# Altium PCB PCB_proj_module_1_1.PcbDoc (part 6 of 9)
Units mm, origin at the board's own origin, x right, y up, seen from the top; angles counter-clockwise.
Board outline 413 x 280 mm, 4 copper layers (Top Layer, Signal Layer 1, Signal Layer 2, Bottom Layer), stack 0.778 mm thick; 1054 components, 639 nets, 3181 pads, 673 vias.
Unrouted connection lines stored in the file: 570.
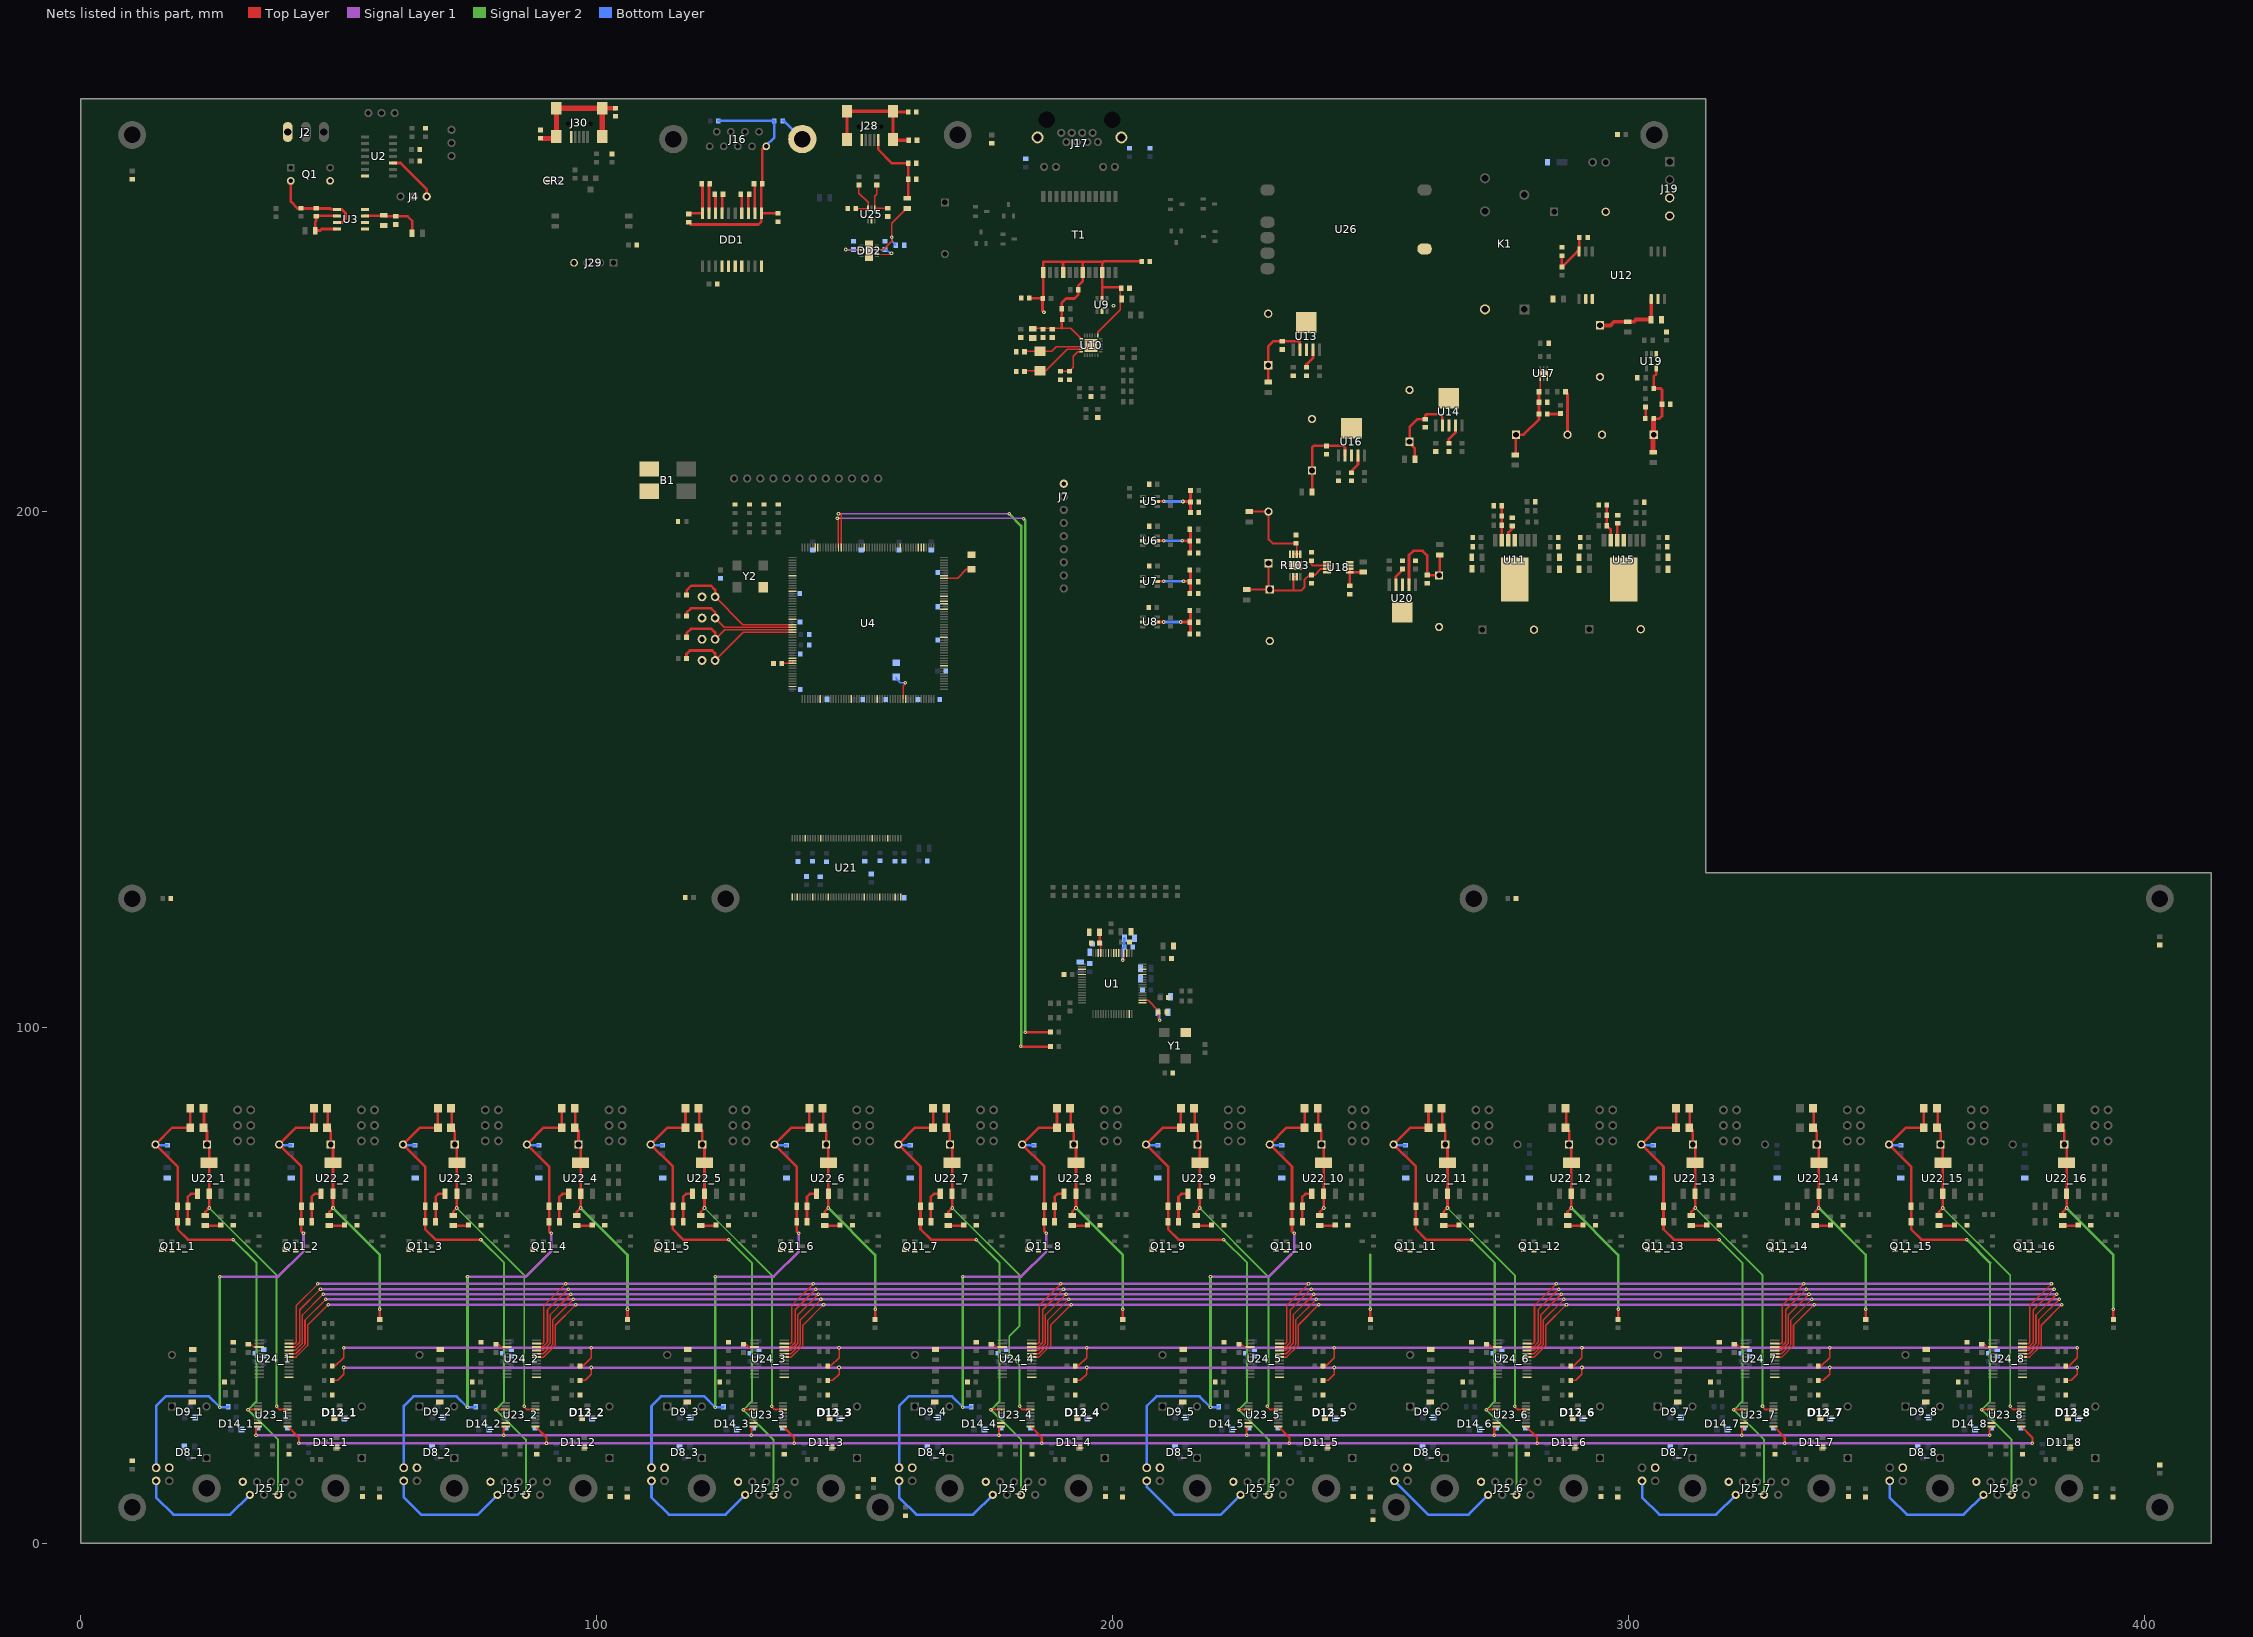
[diagram p7: the nets of this part, all layers, seen from the top]

## Via types
v1: diameter 0.7, hole 0.3, Top Layer to Bottom Layer, tented both sides, 659 vias
v2: diameter 1, hole 0.5, Top Layer to Bottom Layer, tented both sides, 12 vias
v3: diameter 0.66, hole 0.33, Top Layer to Bottom Layer, 2 vias

## Nets (pads, with @x,y where several pads share a name; then routed paths per layer and width w, separated by ;. In a path a pad name is that pad's centre, name@x,y a point inside that pad or via, vN(x,y) a via of type N, cw(c..) or ccw(c..) an arc to the next point about the centre after c; other vN are vias at no path point) (continued)
ADA4254_PGIO0: U4.141 U24_1.23 U24_2.23 U24_3.23 U24_4.23 U24_5.23 U24_6.23 U24_7.23 U24_8.23 | length 452.7
  Top Layer w0.3: U24_1.23@40.37,38.725 41.525,38.725 41.8,39 41.8,46.1 v1(46,50.3) ; U24_2.23@88.37,38.725 89.525,38.725 89.8,39 89.8,46.1 v1(94,50.3) ; U24_3.23@136.37,38.725 137.525,38.725 137.8,39 137.8,46.1 v1(142,50.3) ; U24_4.23@184.37,38.725 185.525,38.725 185.8,39 185.8,46.1 v1(190,50.3) ; U24_5.23@232.37,38.725 233.525,38.725 233.8,39 233.8,46.1 v1(238,50.3) ; U24_6.23@280.37,38.725 281.525,38.725 281.8,39 281.8,46.1 v1(286,50.3) ; U24_7.23@328.37,38.725 329.525,38.725 329.8,39 329.8,46.1 v1(334,50.3) ; U24_8.23@376.37,38.725 377.525,38.725 377.8,39 377.8,46.1 v1(382,50.3)
  Signal Layer 1 w0.5: v1(46,50.3) v1(94,50.3) v1(142,50.3) v1(190,50.3) v1(238,50.3) v1(286,50.3) v1(334,50.3) v1(382,50.3)
ADA4254_PGIO1: U4.161 U24_1.22 U24_2.22 U24_3.22 U24_4.22 U24_5.22 U24_6.22 U24_7.22 U24_8.22 | length 451.8
  Top Layer w0.3: U24_1.22@40.37,38.075 41.582,38.075 42.5,38.993 42.5,45.3 v1(46.5,49.3) ; U24_2.22@88.37,38.075 89.582,38.075 90.5,38.993 90.5,45.3 v1(94.5,49.3) ; U24_3.22@136.37,38.075 137.582,38.075 138.5,38.993 138.5,45.3 v1(142.5,49.3) ; U24_4.22@184.37,38.075 185.582,38.075 186.5,38.993 186.5,45.3 v1(190.5,49.3) ; U24_5.22@232.37,38.075 233.582,38.075 234.5,38.993 234.5,45.3 v1(238.5,49.3) ; U24_6.22@280.37,38.075 281.582,38.075 282.5,38.993 282.5,45.3 v1(286.5,49.3) ; U24_7.22@328.37,38.075 329.582,38.075 330.5,38.993 330.5,45.3 v1(334.5,49.3) ; U24_8.22@376.37,38.075 377.582,38.075 378.5,38.993 378.5,45.3 v1(382.5,49.3)
  Signal Layer 1 w0.5: v1(46.5,49.3) v1(94.5,49.3) v1(142.5,49.3) v1(190.5,49.3) v1(238.5,49.3) v1(286.5,49.3) v1(334.5,49.3) v1(382.5,49.3)
ADA4254_PGIO2: U4.162 U24_1.21 U24_2.21 U24_3.21 U24_4.21 U24_5.21 U24_6.21 U24_7.21 U24_8.21 | length 450.9
  Top Layer w0.3: U24_1.21@40.37,37.425 41.639,37.425 43,38.786 43,44.3 v1(47,48.3) ; U24_2.21@88.37,37.425 89.639,37.425 91,38.786 91,44.3 v1(95,48.3) ; U24_3.21@136.37,37.425 137.639,37.425 139,38.786 139,44.3 v1(143,48.3) ; U24_4.21@184.37,37.425 185.639,37.425 187,38.786 187,44.3 v1(191,48.3) ; U24_5.21@232.37,37.425 233.639,37.425 235,38.786 235,44.3 v1(239,48.3) ; U24_6.21@280.37,37.425 281.639,37.425 283,38.786 283,44.3 v1(287,48.3) ; U24_7.21@328.37,37.425 329.639,37.425 331,38.786 331,44.3 v1(335,48.3) ; U24_8.21@376.37,37.425 377.639,37.425 379,38.786 379,44.3 v1(383,48.3)
  Signal Layer 1 w0.5: v1(47,48.3) v1(95,48.3) v1(143,48.3) v1(191,48.3) v1(239,48.3) v1(287,48.3) v1(335,48.3) v1(383,48.3)
ADA4254_PGIO3: U4.163 U24_1.20 U24_2.20 U24_3.20 U24_4.20 U24_5.20 U24_6.20 U24_7.20 U24_8.20 | length 450
  Top Layer w0.3: U24_1.20@40.37,36.775 41.696,36.775 43.5,38.579 43.5,43.3 v1(47.5,47.3) ; U24_2.20@88.37,36.775 89.696,36.775 91.5,38.579 91.5,43.3 v1(95.5,47.3) ; U24_3.20@136.37,36.775 137.696,36.775 139.5,38.579 139.5,43.3 v1(143.5,47.3) ; U24_4.20@184.37,36.775 185.696,36.775 187.5,38.579 187.5,43.3 v1(191.5,47.3) ; U24_5.20@232.37,36.775 233.696,36.775 235.5,38.579 235.5,43.3 v1(239.5,47.3) ; U24_6.20@280.37,36.775 281.696,36.775 283.5,38.579 283.5,43.3 v1(287.5,47.3) ; U24_7.20@328.37,36.775 329.696,36.775 331.5,38.579 331.5,43.3 v1(335.5,47.3) ; U24_8.20@376.37,36.775 377.696,36.775 379.5,38.579 379.5,43.3 v1(383.5,47.3)
  Signal Layer 1 w0.5: v1(47.5,47.3) v1(95.5,47.3) v1(143.5,47.3) v1(191.5,47.3) v1(239.5,47.3) v1(287.5,47.3) v1(335.5,47.3) v1(383.5,47.3)
ADA4254_PGIO4: U4.8 U24_1.19 U24_2.19 U24_3.19 U24_4.19 U24_5.19 U24_6.19 U24_7.19 U24_8.19 | length 449.2
  Top Layer w0.3: U24_1.19@40.37,36.125 41.753,36.125 44,38.372 44,42.3 v1(48,46.3) ; U24_2.19@88.37,36.125 89.753,36.125 92,38.372 92,42.3 v1(96,46.3) ; U24_3.19@136.37,36.125 137.753,36.125 140,38.372 140,42.3 v1(144,46.3) ; U24_4.19@184.37,36.125 185.753,36.125 188,38.372 188,42.3 v1(192,46.3) ; U24_5.19@232.37,36.125 233.753,36.125 236,38.372 236,42.3 v1(240,46.3) ; U24_6.19@280.37,36.125 281.753,36.125 284,38.372 284,42.3 v1(288,46.3) ; U24_7.19@328.37,36.125 329.753,36.125 332,38.372 332,42.3 v1(336,46.3) ; U24_8.19@376.37,36.125 377.753,36.125 380,38.372 380,42.3 v1(384,46.3)
  Signal Layer 1 w0.5: v1(48,46.3) v1(96,46.3) v1(144,46.3) v1(192,46.3) v1(240,46.3) v1(288,46.3) v1(336,46.3) v1(384,46.3)
ADG1607_A0: U4.138
ADG1607_A1: U4.139
ADG1609_A0: U23_1.1 U23_2.1 U23_3.1 U23_4.1 U23_5.1 U23_6.1 U23_7.1 U23_8.1 | length 369.6
  Top Layer w0.4: U23_1.1@40.14,22.7 42.3,20.54 v1(42.3,19.4) ; U23_2.1@88.14,22.7 90.3,20.54 v1(90.3,19.4) ; U23_3.1@136.14,22.7 138.3,20.54 v1(138.3,19.4) ; U23_4.1@184.14,22.7 186.3,20.54 v1(186.3,19.4) ; U23_5.1@232.14,22.7 234.3,20.54 v1(234.3,19.4) ; U23_6.1@280.14,22.7 282.3,20.54 v1(282.3,19.4) ; U23_7.1@328.14,22.7 330.3,20.54 v1(330.3,19.4) ; U23_8.1@376.14,22.7 378.3,20.54 v1(378.3,19.4)
  Signal Layer 1 w0.5: v1(42.3,19.4) v1(90.3,19.4) v1(138.3,19.4) v1(186.3,19.4) v1(234.3,19.4) v1(282.3,19.4) v1(330.3,19.4) v1(378.3,19.4)
ADG1609_A1: U23_1.16 U23_2.16 U23_3.16 U23_4.16 U23_5.16 U23_6.16 U23_7.16 U23_8.16 | length 350.9
  Top Layer w0.4: v1(34,21) 34,22.3 U23_1.16@34.4,22.7 ; v1(82,21) 82,22.3 U23_2.16@82.4,22.7 ; v1(130,21) 130,22.3 U23_3.16@130.4,22.7 ; v1(178,21) 178,22.3 U23_4.16@178.4,22.7 ; v1(226,21) 226,22.3 U23_5.16@226.4,22.7 ; v1(274,21) 274,22.3 U23_6.16@274.4,22.7 ; v1(322,21) 322,22.3 U23_7.16@322.4,22.7 ; v1(370,21) 370,22.3 U23_8.16@370.4,22.7
  Signal Layer 1 w0.5: v1(34,21) v1(82,21) v1(130,21) v1(178,21) v1(226,21) v1(274,21) v1(322,21) v1(370,21)
AGND: C45.1
cfg0: J12.2 R41.1 U4.27 | length 25.7
  Top Layer w0.254: J12.2@122.986,183.464 128.344,178.106 U4.27@137.986,178.106
  Top Layer w0.5: R41.1@117.45,183.84 117.45,184.725 118.35,185.625 122.2,185.625 122.986,184.839 J12.2@122.986,183.464
cfg1: J13.2 R44.1 U4.28 | length 23.7
  Top Layer w0.254: J13.2@122.986,179.359 124.739,177.606 U4.28@137.986,177.606
  Top Layer w0.5: R44.1@117.45,179.736 117.45,180.425 118.275,181.25 122.225,181.25 122.986,180.489 J13.2@122.986,179.359
cfg2: J14.2 R47.1 U4.29 | length 24.1
  Top Layer w0.254: J14.2@122.986,175.255 124.837,177.106 U4.29@137.986,177.106
  Top Layer w0.5: R47.1@117.45,175.631 117.45,176.45 118.275,177.275 122.275,177.275 122.986,176.564 J14.2@122.986,175.255
cfg3: J15.2 R50.1 U4.30 | length 25.6
  Top Layer w0.254: J15.2@122.986,171.15 128.442,176.606 U4.30@137.986,176.606
  Top Layer w0.508: R50.1@117.45,171.526 117.45,172.425 118.1,173.075 122.425,173.075 122.986,172.514 J15.2@122.986,171.15
CHall+_1: J25_1.6 J27_1.1 | length 24.3
  Bottom Layer w0.508: J27_1.1@14.648,12.136 14.648,8.952 18,5.6 28.996,5.6 J25_1.6@32.812,9.416
CHall+_2: J25_2.6 J27_2.1 | length 24.3
  Bottom Layer w0.508: J27_2.1@62.648,12.136 62.648,8.952 66,5.6 76.996,5.6 J25_2.6@80.812,9.416
CHall+_3: J25_3.6 J27_3.1 | length 24.3
  Bottom Layer w0.508: J27_3.1@110.648,12.136 110.648,8.952 114,5.6 124.996,5.6 J25_3.6@128.812,9.416
CHall+_4: J25_4.6 J27_4.1 | length 24.3
  Bottom Layer w0.508: J27_4.1@158.648,12.136 158.648,8.952 162,5.6 172.996,5.6 J25_4.6@176.812,9.416
CHall+_5: J25_5.6 J27_5.1 | length 23.1
  Bottom Layer w0.508: J27_5.1@206.648,12.136 206.648,10.952 212,5.6 220.996,5.6 J25_5.6@224.812,9.416
CHall+_6: J25_6.6 J27_6.1 | length 22.5
  Bottom Layer w0.508: J27_6.1@254.648,12.136 261.184,5.6 268.996,5.6 J25_6.6@272.812,9.416
CHall+_7: J25_7.6 J27_7.1 | length 24.3
  Bottom Layer w0.508: J27_7.1@302.648,12.136 302.648,8.952 306,5.6 316.996,5.6 J25_7.6@320.812,9.416
CHall+_8: J25_8.6 J27_8.1 | length 24.3
  Bottom Layer w0.508: J27_8.1@350.648,12.136 350.648,8.952 354,5.6 364.996,5.6 J25_8.6@368.812,9.416
CPt+_1: C148_1.1 J25_1.8 R1_1.1 R2_1.1 R3_1.1 R117_1.2 TP11_1.2 U23_1.11 | length 100.4
  Top Layer w0.4: v1(32.45,25.95) U23_1.11@34.4,25.95
  Top Layer w0.5: R1_1.1@21.25,84.334 21.25,80.711 21.123,80.584 17.764,80.584 TP11_1.2@14.5,77.32 18.8,73.02 C148_1.1@18.8,65.4 R3_1.1@18.8,62.4 18.8,60.9 20.8,58.9 v1(29.6,58.9)
  Signal Layer 2 w0.4: v1(29.6,58.9) 34.1,54.4 34.1,27.539 32.511,25.95 v1(32.45,25.95) 38.292,20.108 J25_1.8@38.292,9.416
  Bottom Layer w0.5: TP11_1.2@14.5,77.32 14.65,77.17 R117_1.2@16.82,77.17
CPt+_2: C148_3.1 J25_2.8 R1_3.1 R2_3.1 R3_3.1 R117_3.2 TP11_3.2 U23_2.11 | length 100.4
  Top Layer w0.4: v1(80.45,25.95) U23_2.11@82.4,25.95
  Top Layer w0.5: R1_3.1@69.25,84.334 69.25,80.711 69.123,80.584 65.764,80.584 TP11_3.2@62.5,77.32 66.8,73.02 C148_3.1@66.8,65.4 R3_3.1@66.8,62.4 66.8,60.9 68.8,58.9 v1(77.6,58.9)
  Signal Layer 2 w0.4: v1(77.6,58.9) 82.1,54.4 82.1,27.539 80.511,25.95 v1(80.45,25.95) 86.292,20.108 J25_2.8@86.292,9.416
  Bottom Layer w0.5: TP11_3.2@62.5,77.32 62.65,77.17 R117_3.2@64.82,77.17
CPt+_3: C148_5.1 J25_3.8 R1_5.1 R2_5.1 R3_5.1 R117_5.2 TP11_5.2 U23_3.11 | length 100.4
  Top Layer w0.4: v1(128.45,25.95) U23_3.11@130.4,25.95
  Top Layer w0.5: R1_5.1@117.25,84.334 117.25,80.711 117.123,80.584 113.764,80.584 TP11_5.2@110.5,77.32 114.8,73.02 C148_5.1@114.8,65.4 R3_5.1@114.8,62.4 114.8,60.9 116.8,58.9 v1(125.6,58.9)
  Signal Layer 2 w0.4: v1(125.6,58.9) 130.1,54.4 130.1,27.539 128.511,25.95 v1(128.45,25.95) 134.292,20.108 J25_3.8@134.292,9.416
  Bottom Layer w0.5: TP11_5.2@110.5,77.32 110.65,77.17 R117_5.2@112.82,77.17
CPt+_4: C148_7.1 J25_4.8 R1_7.1 R2_7.1 R3_7.1 R117_7.2 TP11_7.2 U23_4.11 | length 100.4
  Top Layer w0.4: v1(176.45,25.95) U23_4.11@178.4,25.95
  Top Layer w0.5: R1_7.1@165.25,84.334 165.25,80.711 165.123,80.584 161.764,80.584 TP11_7.2@158.5,77.32 162.8,73.02 C148_7.1@162.8,65.4 R3_7.1@162.8,62.4 162.8,60.9 164.8,58.9 v1(173.6,58.9)
  Signal Layer 2 w0.4: v1(173.6,58.9) 178.1,54.4 178.1,27.539 176.511,25.95 v1(176.45,25.95) 182.292,20.108 J25_4.8@182.292,9.416
  Bottom Layer w0.5: TP11_7.2@158.5,77.32 158.65,77.17 R117_7.2@160.82,77.17
CPt+_5: C148_9.1 J25_5.8 R1_9.1 R2_9.1 R3_9.1 R117_9.2 TP11_9.2 U23_5.11 | length 100.4
  Top Layer w0.4: v1(224.45,25.95) U23_5.11@226.4,25.95
  Top Layer w0.5: R1_9.1@213.25,84.334 213.25,80.711 213.123,80.584 209.764,80.584 TP11_9.2@206.5,77.32 210.8,73.02 C148_9.1@210.8,65.4 R3_9.1@210.8,62.4 210.8,60.9 212.8,58.9 v1(221.6,58.9)
  Signal Layer 2 w0.4: v1(221.6,58.9) 226.1,54.4 226.1,27.539 224.511,25.95 v1(224.45,25.95) 230.292,20.108 J25_5.8@230.292,9.416
  Bottom Layer w0.5: TP11_9.2@206.5,77.32 206.65,77.17 R117_9.2@208.82,77.17
CPt+_6: C148_11.1 J25_6.8 R1_11.1 R2_11.1 R3_11.1 R117_11.2 TP11_11.2 U23_6.11 | length 100.4
  Top Layer w0.4: v1(272.45,25.95) U23_6.11@274.4,25.95
  Top Layer w0.5: R1_11.1@261.25,84.334 261.25,80.711 261.123,80.584 257.764,80.584 TP11_11.2@254.5,77.32 258.8,73.02 C148_11.1@258.8,65.4 R3_11.1@258.8,62.4 258.8,60.9 260.8,58.9 v1(269.6,58.9)
  Signal Layer 2 w0.4: v1(269.6,58.9) 274.1,54.4 274.1,27.539 272.511,25.95 v1(272.45,25.95) 278.292,20.108 J25_6.8@278.292,9.416
  Bottom Layer w0.5: TP11_11.2@254.5,77.32 254.65,77.17 R117_11.2@256.82,77.17
CPt+_7: C148_13.1 J25_7.8 R1_13.1 R2_13.1 R3_13.1 R117_13.2 TP11_13.2 U23_7.11 | length 100.4
  Top Layer w0.4: v1(320.45,25.95) U23_7.11@322.4,25.95
  Top Layer w0.5: R1_13.1@309.25,84.334 309.25,80.711 309.123,80.584 305.764,80.584 TP11_13.2@302.5,77.32 306.8,73.02 C148_13.1@306.8,65.4 R3_13.1@306.8,62.4 306.8,60.9 308.8,58.9 v1(317.6,58.9)
  Signal Layer 2 w0.4: v1(317.6,58.9) 322.1,54.4 322.1,27.539 320.511,25.95 v1(320.45,25.95) 326.292,20.108 J25_7.8@326.292,9.416
  Bottom Layer w0.5: TP11_13.2@302.5,77.32 302.65,77.17 R117_13.2@304.82,77.17
CPt+_8: C148_15.1 J25_8.8 R1_15.1 R2_15.1 R3_15.1 R117_15.2 TP11_15.2 U23_8.11 | length 100.4
  Top Layer w0.4: v1(368.45,25.95) U23_8.11@370.4,25.95
  Top Layer w0.5: R1_15.1@357.25,84.334 357.25,80.711 357.123,80.584 353.764,80.584 TP11_15.2@350.5,77.32 354.8,73.02 C148_15.1@354.8,65.4 R3_15.1@354.8,62.4 354.8,60.9 356.8,58.9 v1(365.6,58.9)
  Signal Layer 2 w0.4: 370.1,54.4 370.1,27.539 368.511,25.95 v1(368.45,25.95) 374.292,20.108 J25_8.8@374.292,9.416
  Signal Layer 2 w0.5: v1(365.6,58.9) 370.1,54.4
  Bottom Layer w0.5: TP11_15.2@350.5,77.32 350.65,77.17 R117_15.2@352.82,77.17
CurrOff: J4.3 U2.10 | length 10.1
  Top Layer w0.5: U2.10@60.505,267.554 62.017,267.554 67.09,262.481 J4.3@67.09,261.066
GND: B1.1 B1.2 C1.2 C2.1 C3.1 C4.1 C5.1 C6.2 C7.2 C8.1 C9.1 C10.1 C11.1 C12.2 C13.2 C14.1 C15.2 C16.1 C17.2 C18.1 C19.2 C20.1 C21.2 C22.1 C23.1 C24.1 C27.1 C28.1 C29.1 C30.1 C31.1 C32.1 C33.1 C34.1 C35.1 C36.1 C37.1 C38.1 C39.1 C40.1 C41.1 C42.1 C43.1 C44.1 C46.2 C47.2 C48.1 C49.1 C50.1 C51.2 C52.1 C53.1 C54.1 C55.1 C56.1 C57.1 C58.2 C59.2 C60.2 C62.1 C65.1 C66.1 C67.1 C69.1 C72.1 C73.1 C74.1 C75.1 C76.1 C77.1 C78.2 C79.1 C80.1 C81.1 C82.1 C83.1 C85.1 C86.1 C87.1 C88.1 C89.1 C90.1 C91.1 C92.1 C93.2 C94.2 C95.2 C96.1 C97.1 C98.1 C100.1 C104.2 C105.1 C106.1 C108.1 C109.1 C110.1 C111.1 C112.1 C113.1 C114.1 C115.1 C116.2 C117.2 C118.1 C119.1 C121.1 C122.1 C123.1 C124.1 C125.1 C126.1 C127.1 C129.1 C130.1 C131.2 C132.1 C133.1 C134.1 C135.1 C136.1 C137.1 C138.1 C139.1 C140.1 C141.1 C142.1 C143.1 C144.2 C145.1 C146.1 C147_1.2 C147_2.2 C147_3.2 C147_4.2 C147_5.2 C147_6.2 C147_7.2 C147_8.2 C149_1.1 C149_2.1 C149_3.1 C149_4.1 C149_5.1 C149_6.1 C149_7.1 C149_8.1 C149_9.1 C149_10.1 C149_11.1 C149_12.1 C149_13.1 C149_14.1 C149_15.1 C149_16.1 C150_1.1 C150_2.1 C150_3.1 C150_4.1 C150_5.1 C150_6.1 C150_7.1 C150_8.1 C151_1.2 C151_2.2 C151_3.2 C151_4.2 C151_5.2 C151_6.2 C151_7.2 C151_8.2 C152_1.1 C152_2.1 C152_3.1 C152_4.1 C152_5.1 C152_6.1 C152_7.1 C152_8.1 C153_1.1 C153_2.1 C153_3.1 C153_4.1 C153_5.1 C153_6.1 C153_7.1 C153_8.1 C154_1.1 C154_2.1 C154_3.1 C154_4.1 C154_5.1 C154_6.1 C154_7.1 C154_8.1 C155_1.1 C155_2.1 C155_3.1 C155_4.1 C155_5.1 C155_6.1 C155_7.1 C155_8.1 C156_1.1 C156_2.1 C156_3.1 C156_4.1 C156_5.1 C156_6.1 C156_7.1 C156_8.1 C157_1.2 C157_2.2 C157_3.2 C157_4.2 C157_5.2 C157_6.2 C157_7.2 C157_8.2 C158_1.2 C158_2.2 C158_3.2 C158_4.2 C158_5.2 C158_6.2 C158_7.2 C158_8.2 C161_1.1 C161_2.1 C161_3.1 C161_4.1 C161_5.1 C161_6.1 C161_7.1 C161_8.1 C162_1.1 C162_2.1 C162_3.1 C162_4.1 C162_5.1 C162_6.1 C162_7.1 C162_8.1 CR2.2 D1.1 D2.1 D3.1 D4.1 D5.2 D8_1.1 D8_2.1 D8_3.1 D8_4.1 D8_5.1 D8_6.1 D8_7.1 D8_8.1 D9_1.1 D9_2.1 D9_3.1 D9_4.1 D9_5.1 D9_6.1 D9_7.1 D9_8.1 D10.1 D11_1.1 D11_2.1 D11_3.1 D11_4.1 D11_5.1 D11_6.1 D11_7.1 D11_8.1 D12_1.1 D12_2.1 D12_3.1 D12_4.1 D12_5.1 D12_6.1 D12_7.1 D12_8.1 D13_1.1 D13_2.1 D13_3.1 D13_4.1 D13_5.1 D13_6.1 D13_7.1 D13_8.1 D14_1.1 D14_2.1 D14_3.1 D14_4.1 D14_5.1 D14_6.1 D14_7.1 D14_8.1 DD1.4 DD1.5 DD1.6 DD1.7 DD1.10 DD2.5 DD2.13 J2.3 J7.3 J12.1 J13.1 J14.1 J15.1 J17.SHIELD J19.3 J19.4 J25_1.1 J25_2.1 J25_3.1 J25_4.1 J25_5.1 J25_6.1 J25_7.1 J25_8.1 J26_1.1 J26_2.1 J26_3.1 J26_4.1 J26_5.1 J26_6.1 J26_7.1 J26_8.1 J28.5 J29.4 J30.5 K1.5 Q1.3 Q11_1.2 Q11_2.2 Q11_3.2 Q11_4.2 Q11_5.2 Q11_6.2 Q11_7.2 Q11_8.2 Q11_9.2 Q11_10.2 Q11_11.2 Q11_12.2 Q11_13.2 Q11_14.2 Q11_15.2 Q11_16.2 R27.2 R28.2 R36.1 R42.1 R46.1 R51.1 R54.1 R55.2 R56.1 R66.1 R68.2 R72.1 R73.1 R74.1 R78.1 R79.1 R81.1 R82.1 R83.1 R84.1 R86.1 R87.1 R88.1 R89.1 R91.1 R92.1 R96.1 R97.1 R99.1 R103.4 R103.9 R107.1 R109.2 R112.1 R115_1.1 R115_2.1 R115_3.1 R115_4.1 R115_5.1 R115_6.1 R115_7.1 R115_8.1 R115_9.1 R115_10.1 R115_11.1 R115_12.1 R115_13.1 R115_14.1 R115_15.1 R115_16.1 R116_1.1 R116_2.1 R116_3.1 R116_4.1 R116_5.1 R116_6.1 R116_7.1 R116_8.1 R116_9.1 R116_10.1 R116_11.1 R116_12.1 R116_13.1 R116_14.1 R116_15.1 R116_16.1 R120_1.1 R120_2.1 R120_3.1 R120_4.1 R120_5.1 R120_6.1 R120_7.1 R120_8.1 R127.1 R129_1.1 R129_2.1 R129_3.1 R129_4.1 R129_5.1 R129_6.1 R129_7.1 R129_8.1 TP1.2 TP2.2 TP3.2 TP4.2 TP5.2 TP6.2 TP7.2 TP9.2 TP10.2 TP16.2 TP17.2 U1.3 U1.5 U1.31 U1.33 U1.44 U1.46 U1.51 U1.54 U1.55 U1.56 U1.58 U1.62 U2.7 U3.1 U3.2 U3.4 U4.14 U4.25 U4.40 U4.51 U4.60 U4.72 U4.82 U4.93 U4.114 U4.125 U4.136 U4.149 U4.170 U4.184 U4.202 U4.203 U5.2 U6.2 U7.2 U8.2 U9.2 U10.25 U11.4 U11.8 U12.2 U12.3 U12.13 U13.3 U13.6 U14.3 U14.6 U15.4 U15.8 U16.3 U16.6 U17.3 U17.7 U18.3 U18.4 U18.5 U18.8 U19.1 U20.3 U20.6 U21.6 U21.12 U21.32 U21.38 U21.44 U21.46 U21.52 U21.58 U21.72 U21.78 U21.84 U21.86 U23_1.15 U23_2.15 U23_3.15 U23_4.15 U23_5.15 U23_6.15 U23_7.15 U23_8.15 U24_1.3 U24_1.13 U24_2.3 U24_2.13 U24_3.3 U24_3.13 U24_4.3 U24_4.13 U24_5.3 U24_5.13 U24_6.3 U24_6.13 U24_7.3 U24_7.13 U24_8.3 U24_8.13 U25.2 U26.6 Y1.2 Y2.2 | length 29.1
  Top Layer w0.2: DD2.13@153.485,251.222 DD2.5@154.335,251.222
  Top Layer w0.254: U1.46@205.842,111.29 U1.46@205.858,111.274
  Top Layer w0.3: C153_1.1@32.5,38.6 33,38.6 33.525,38.075 U24_1.3@34.63,38.075 ; C153_2.1@80.5,38.6 81,38.6 81.525,38.075 U24_2.3@82.63,38.075 ; C153_3.1@128.5,38.6 129,38.6 129.525,38.075 U24_3.3@130.63,38.075 ; DD2.13@152.835,250.572 DD2.13@153.485,251.222 ; C153_4.1@176.5,38.6 177,38.6 177.525,38.075 U24_4.3@178.63,38.075 ; C153_5.1@224.5,38.6 225,38.6 225.525,38.075 U24_5.3@226.63,38.075 ; C153_6.1@272.5,38.6 273,38.6 273.525,38.075 U24_6.3@274.63,38.075 ; C153_7.1@320.5,38.6 321,38.6 321.525,38.075 U24_7.3@322.63,38.075 ; C153_8.1@368.5,38.6 369,38.6 369.525,38.075 U24_8.3@370.63,38.075
  Top Layer w0.508: R99.1@287.799,223.236 288.2,222.835 TP7.2@288.2,214.9
  other v1: 200.2,239.9
  other v3: 195.269,232.824 196.469,232.824
GND_ISO: C25.1 C26.1 Q1.2 U3.5 U3.7 | length 18.7
  Top Layer w0.5: Q1.2@40.74,264.096 40.74,260.076 42.07,258.746 43,258.746 48.375,258.746 48.545,258.576 U3.5@49.7,258.576 50.64,258.576 51.35,257.866 51.35,256.666 50.72,256.036 U3.7@49.7,256.036
GND_RS232: C68.1 C70.1 C71.1 DD1.11 J16.5 R55.1 С1.2 | length 49.1
  Top Layer w0.508: C68.1@117.862,256.069 118.28,255.651 131.376,255.651 131.961,256.236 131.961,257.8 DD1.11@131.961,257.831 ; J16.5@132.769,270.853 132.126,270.21 C71.1@132.126,263.533 131.961,263.368 DD1.11@131.961,257.831 ; R55.1@135.2,257.8 131.992,257.8 DD1.11@131.961,257.831
  Bottom Layer w0.508: С1.2@123.617,275.73 C70.1@134.463,275.73 134.463,272.547 J16.5@132.769,270.853
MCU_AVDD: C45.2 U4.41 U4.42 | length 2.8
  Top Layer w0.254: C45.2@135.808,170.355 136.059,170.606 137.986,170.606 U4.41@137.986,171.106
MISO: R4.2 R121_1.1 R121_2.1 R121_3.1 R121_4.1 R121_5.1 R121_6.1 R121_7.1 R121_8.1 U4.193 | length 518.4
  Top Layer w0.254: R121_1.1@48.8,31.6 49.8,31.6 51,32.8 v1(51,34.1) ; R121_2.1@96.8,31.6 97.8,31.6 99,32.8 v1(99,34.1) ; R121_3.1@144.8,31.6 145.8,31.6 147,32.8 v1(147,34.1) ; v1(146.9,199.6) 146.9,199.7 147,199.8 147.4,199.4 U4.193@147.4,193.025 ; R121_4.1@192.8,31.6 193.8,31.6 195,32.8 v1(195,34.1) ; R121_5.1@240.8,31.6 241.8,31.6 243,32.8 v1(243,34.1) ; R121_6.1@288.8,31.6 289.8,31.6 291,32.8 v1(291,34.1) ; R121_7.1@336.8,31.6 337.8,31.6 339,32.8 v1(339,34.1) ; R121_8.1@384.8,31.6 385.8,31.6 387,32.8 v1(387,34.1)
  Top Layer w0.5: v1(182.2,96.4) 182.3,96.3 R4.2@188,96.3
  Signal Layer 1 w0.254: v1(146.9,199.6) v1(180,199.6)
  Signal Layer 1 w0.5: v1(51,34.1) 51.075,34.025 386.925,34.025 v1(387,34.1)
  Signal Layer 2 w0.5: v1(180,199.6) 180,199.5 182.3,197.2 182.3,96.4 v1(182.2,96.4)
MOSI: R5.2 R122_1.1 R122_2.1 R122_3.1 R122_4.1 R122_5.1 R122_6.1 R122_7.1 R122_8.1 U4.194 | length 520.5
  Top Layer w0.254: R122_1.1@48.8,34.4 49.4,34.4 51,36 v1(51,37.9) ; R122_2.1@96.8,34.4 97.4,34.4 99,36 v1(99,37.9) ; R122_3.1@144.8,34.4 145.4,34.4 147,36 v1(147,37.9) ; v1(146.7,198.7) 146.9,198.5 U4.194@146.9,193.025 ; R122_4.1@192.8,34.4 193.4,34.4 195,36 v1(195,37.9) ; R122_5.1@240.8,34.4 241.4,34.4 243,36 v1(243,37.9) ; R122_6.1@288.8,34.4 289.4,34.4 291,36 v1(291,37.9) ; R122_7.1@336.8,34.4 337.4,34.4 339,36 v1(339,37.9) ; R122_8.1@384.8,34.4 385.4,34.4 387,36 v1(387,37.9)
  Top Layer w0.5: v1(183.1,99.1) R5.2@188,99.1
  Signal Layer 1 w0.254: v1(146.7,198.7) 182.7,198.7 v1(182.8,198.6)
  Signal Layer 1 w0.5: v1(51,37.9) v1(99,37.9) v1(147,37.9) v1(195,37.9) v1(243,37.9) v1(291,37.9) v1(339,37.9) v1(387,37.9)
  Signal Layer 2 w0.5: v1(182.8,198.6) 183.1,198.3 183.1,118.8 v1(183.1,99.1)
NetC4_2: C4.2 C10.2 U1.52 | length 5.7
  Top Layer w0.3: v1(202.023,113.079) 202.228,113.285 U1.52@202.228,114.404
  Bottom Layer w0.5: v1(202.023,113.079) 202.023,115.323 C4.2@202.3,115.6 C10.2@202.3,117.3
NetC6_1: C6.1 C12.1 U1.34 | length 7.6
  Top Layer w0.254: U1.34@205.858,105.274 206.922,105.274 208.898,103.298 C6.1@208.898,102.981 208.898,101.701 v1(209.2,101.4)
  Bottom Layer w0.254: C12.1@208.868,102.936 209.2,102.604 v1(209.2,101.4) ; C12.1@209.122,103.444 C12.1@209.123,103.443
NetC14_2: C14.2 C18.2 U1.61 | length 4.2
  Top Layer w0.254: C18.2@197.5,116.4 197.728,116.172 197.728,115.858 197.695,115.824 197.695,114.437 U1.61@197.728,114.404
  Top Layer w0.5: C18.2@197.5,116.4 C14.2@197.5,118.5
NetC23_1_1: C23_1.1 R113_1.2 | length 3
  Top Layer w0.5: C23_1.1@24.2,61.6 27.06,61.6 R113_1.2@27.18,61.72
NetC23_1_2: C23_1.2 R1_1.2 R2_1.2 TP11_1.1 U22_1.2 U22_1.4 U23_1.6 | length 67.6
  Top Layer w0.35: v1(38,26.6) 38,26.5 38.55,25.95 U23_1.6@40.14,25.95
  Top Layer w0.5: R1_1.2@23.79,84.334 23.917,84.207 23.917,80.584 24.5,80.001 TP11_1.1@24.5,77.32 ; C23_1.2@24.2,63.6 24.2,64.29 v1(24.93,65.02) U22_1.2@24.93,67.77 U22_1.4@24.93,73.77 TP11_1.1@24.93,77.32
  Signal Layer 2 w0.35: v1(24.93,65.02) 38,51.95 v1(38,26.6)
NetC23_2: C23.2 C24.2 L1.1 U3.3 | length 11.9
  Top Layer w0.5: U3.3@55.1,257.306 58.735,257.306 58.803,257.238 C24.2@61.089,257.238 63.378,257.238 64.25,256.366 L1.1@64.25,253.966
NetC23_2_1: C23_2.1 R113_2.2 | length 3
  Top Layer w0.5: C23_2.1@48.2,61.6 51.06,61.6 R113_2.2@51.18,61.72
NetC23_2_2: C23_2.2 R1_2.2 R2_2.2 R131_1.1 TP11_2.1 U22_2.2 U22_2.4 | length 46.7
  Top Layer w0.5: R1_2.2@47.79,84.334 47.917,84.207 47.917,80.584 48.5,80.001 TP11_2.1@48.5,77.32 ; C23_2.2@48.2,63.6 48.2,64.29 v1(48.93,65.02) U22_2.2@48.93,67.77 U22_2.4@48.93,73.77 TP11_2.1@48.93,77.32 ; R131_1.1@58,43.4 v1(58,45.4)
  Signal Layer 2 w0.5: v1(48.93,65.02) 58,55.95 v1(58,45.4)
NetC23_3_1: C23_3.1 R113_3.2 | length 3
  Top Layer w0.5: C23_3.1@72.2,61.6 75.06,61.6 R113_3.2@75.18,61.72
NetC23_3_2: C23_3.2 R1_3.2 R2_3.2 TP11_3.1 U22_3.2 U22_3.4 U23_2.6 | length 67.7
  Top Layer w0.35: v1(86,26.6) 86,26.5 86.55,25.95 U23_2.6@88.14,25.95
  Top Layer w0.5: R1_3.2@71.79,84.334 71.917,84.207 71.917,80.584 72.5,80.001 TP11_3.1@72.5,77.32 ; C23_3.2@72.2,63.6 72.2,64.29 v1(72.93,65.02) U22_3.2@72.93,67.77 U22_3.4@72.93,73.77 TP11_3.1@72.93,77.32
  Signal Layer 2 w0.35: v1(72.93,65.02) 86,51.95 v1(86,26.6)
  Signal Layer 2 w0.5: v1(72.93,65.02) v1@73,64.95
NetC23_4_1: C23_4.1 R113_4.2 | length 3
  Top Layer w0.5: C23_4.1@96.2,61.6 99.06,61.6 R113_4.2@99.18,61.72
NetC23_4_2: C23_4.2 R1_4.2 R2_4.2 R131_2.1 TP11_4.1 U22_4.2 U22_4.4 | length 46.7
  Top Layer w0.5: R1_4.2@95.79,84.334 95.917,84.207 95.917,80.584 96.5,80.001 TP11_4.1@96.5,77.32 ; C23_4.2@96.2,63.6 96.2,64.29 v1(96.93,65.02) U22_4.2@96.93,67.77 U22_4.4@96.93,73.77 TP11_4.1@96.93,77.32 ; R131_2.1@106,43.4 v1(106,45.4)
  Signal Layer 2 w0.5: v1(96.93,65.02) 106,55.95 v1(106,45.4)
NetC23_5_1: C23_5.1 R113_5.2 | length 3
  Top Layer w0.5: C23_5.1@120.2,61.6 123.06,61.6 R113_5.2@123.18,61.72
NetC23_5_2: C23_5.2 R1_5.2 R2_5.2 TP11_5.1 U22_5.2 U22_5.4 U23_3.6 | length 67.7
  Top Layer w0.35: v1(134,26.6) 134,26.5 134.55,25.95 U23_3.6@136.14,25.95
  Top Layer w0.5: R1_5.2@119.79,84.334 119.917,84.207 119.917,80.584 120.5,80.001 TP11_5.1@120.5,77.32 ; C23_5.2@120.2,63.6 120.2,64.29 v1(120.93,65.02) U22_5.2@120.93,67.77 U22_5.4@120.93,73.77 TP11_5.1@120.93,77.32
  Signal Layer 2 w0.35: v1(120.93,65.02) 134,51.95 v1(134,26.6)
  Signal Layer 2 w0.5: v1(120.93,65.02) v1@121,64.95
NetC23_6_1: C23_6.1 R113_6.2 | length 3
  Top Layer w0.5: C23_6.1@144.2,61.6 147.06,61.6 R113_6.2@147.18,61.72
NetC23_6_2: C23_6.2 R1_6.2 R2_6.2 R131_3.1 TP11_6.1 U22_6.2 U22_6.4 | length 46.7
  Top Layer w0.5: R1_6.2@143.79,84.334 143.917,84.207 143.917,80.584 144.5,80.001 TP11_6.1@144.5,77.32 ; C23_6.2@144.2,63.6 144.2,64.29 v1(144.93,65.02) U22_6.2@144.93,67.77 U22_6.4@144.93,73.77 TP11_6.1@144.93,77.32 ; R131_3.1@154,43.4 v1(154,45.4)
  Signal Layer 2 w0.5: v1(144.93,65.02) 154,55.95 v1(154,45.4)
NetC23_7_1: C23_7.1 R113_7.2 | length 3
  Top Layer w0.5: C23_7.1@168.2,61.6 171.06,61.6 R113_7.2@171.18,61.72
NetC23_7_2: C23_7.2 R1_7.2 R2_7.2 TP11_7.1 U22_7.2 U22_7.4 U23_4.6 | length 69.4
  Top Layer w0.35: v1(182,26.6) 182,26.5 182.55,25.95 U23_4.6@184.14,25.95
  Top Layer w0.5: R1_7.2@167.79,84.334 167.917,84.207 167.917,80.584 168.5,80.001 TP11_7.1@168.5,77.32 ; C23_7.2@168.2,63.6 168.2,64.29 v1(168.93,65.02) U22_7.2@168.93,67.77 U22_7.4@168.93,73.77 TP11_7.1@168.93,77.32
  Signal Layer 2 w0.35: v1(168.93,65.02) 182,51.95 182,42.2 180,40.2 180,36.5 182,34.5 v1(182,26.6)
  Signal Layer 2 w0.5: v1(168.93,65.02) v1@169,64.95
NetC23_8_1: C23_8.1 R113_8.2 | length 3
  Top Layer w0.5: C23_8.1@192.2,61.6 195.06,61.6 R113_8.2@195.18,61.72
NetC23_8_2: C23_8.2 R1_8.2 R2_8.2 R131_4.1 TP11_8.1 U22_8.2 U22_8.4 | length 46.8
  Top Layer w0.5: R1_8.2@191.79,84.334 191.917,84.207 191.917,80.584 192.5,80.001 TP11_8.1@192.5,77.32 ; C23_8.2@192.2,63.6 192.2,64.29 v1(192.93,65.02) U22_8.2@192.93,67.77 U22_8.4@192.93,73.77 TP11_8.1@192.93,77.32 ; R131_4.1@202,43.4 v1(202,45.4)
  Signal Layer 2 w0.5: v1@193,64.95 v1(192.93,65.02) 202,55.95 v1(202,45.4)
NetC23_9_1: C23_9.1 R113_9.2 | length 3
  Top Layer w0.5: C23_9.1@216.2,61.6 219.06,61.6 R113_9.2@219.18,61.72
NetC23_9_2: C23_9.2 R1_9.2 R2_9.2 TP11_9.1 U22_9.2 U22_9.4 U23_5.6 | length 67.9
  Top Layer w0.35: v1(230,26.6) 230,26.5 230.55,25.95 U23_5.6@232.14,25.95
  Top Layer w0.5: R1_9.2@215.79,84.334 215.917,84.207 215.917,80.584 216.5,80.001 TP11_9.1@216.5,77.32 ; C23_9.2@216.2,63.6 216.2,64.29 v1(216.93,65.02) U22_9.2@216.93,67.77 U22_9.4@216.93,73.77 TP11_9.1@216.93,77.32
  Signal Layer 2 w0.35: v1(216.93,65.02) 230.225,51.725 230.225,26.825 v1(230,26.6)
  Signal Layer 2 w0.5: v1(216.93,65.02) v1@217,64.95
NetC23_10_1: C23_10.1 R113_10.2 | length 3
  Top Layer w0.5: C23_10.1@240.2,61.6 243.06,61.6 R113_10.2@243.18,61.72
NetC23_10_2: C23_10.2 R1_10.2 R2_10.2 R131_5.1 TP11_10.1 U22_10.2 U22_10.4 | length 34
  Top Layer w0.5: R1_10.2@239.79,84.334 239.917,84.207 239.917,80.584 240.5,80.001 TP11_10.1@240.5,77.32 ; C23_10.2@240.2,63.6 240.2,64.29 v1(240.93,65.02) U22_10.2@240.93,67.77 U22_10.4@240.93,73.77 TP11_10.1@240.93,77.32 ; R131_5.1@250,43.4 v1(250,45.4)
  Signal Layer 2 w0.5: v1(240.93,65.02) v1@241,64.95 ; v1(250,45.4) 250,55.95
NetC23_11_1: C23_11.1 R113_11.2 | length 3
  Top Layer w0.5: C23_11.1@264.2,61.6 267.06,61.6 R113_11.2@267.18,61.72
NetC23_11_2: C23_11.2 R1_11.2 R2_11.2 TP11_11.1 U22_11.2 U22_11.4 U23_6.6 | length 67.7
  Top Layer w0.35: v1(278,26.6) 278,26.5 278.55,25.95 U23_6.6@280.14,25.95
  Top Layer w0.5: R1_11.2@263.79,84.334 263.917,84.207 263.917,80.584 264.5,80.001 TP11_11.1@264.5,77.32 ; C23_11.2@264.2,63.6 264.2,64.29 v1(264.93,65.02) U22_11.2@264.93,67.77 U22_11.4@264.93,73.77 TP11_11.1@264.93,77.32
  Signal Layer 2 w0.35: v1(264.93,65.02) 278,51.95 v1(278,26.6)
  Signal Layer 2 w0.5: v1(264.93,65.02) v1@265,64.95
NetC23_12_1: C23_12.1 R113_12.2 | length 3
  Top Layer w0.5: C23_12.1@288.2,61.6 291.06,61.6 R113_12.2@291.18,61.72
NetC23_12_2: C23_12.2 R1_12.2 R2_12.2 R131_6.1 TP11_12.1 U22_12.2 U22_12.4 | length 46.8
  Top Layer w0.5: R1_12.2@287.79,84.334 287.917,84.207 287.917,80.584 288.5,80.001 TP11_12.1@288.5,77.32 ; C23_12.2@288.2,63.6 288.2,64.29 v1(288.93,65.02) U22_12.2@288.93,67.77 U22_12.4@288.93,73.77 TP11_12.1@288.93,77.32 ; R131_6.1@298,43.4 v1(298,45.4)
  Signal Layer 2 w0.5: v1@289,64.95 v1(288.93,65.02) 298,55.95 v1(298,45.4)
NetC23_13_1: C23_13.1 R113_13.2 | length 3
  Top Layer w0.5: C23_13.1@312.2,61.6 315.06,61.6 R113_13.2@315.18,61.72
NetC23_13_2: C23_13.2 R1_13.2 R2_13.2 TP11_13.1 U22_13.2 U22_13.4 U23_7.6 | length 67.7
  Top Layer w0.35: v1(326,26.6) 326,26.5 326.55,25.95 U23_7.6@328.14,25.95
  Top Layer w0.5: R1_13.2@311.79,84.334 311.917,84.207 311.917,80.584 312.5,80.001 TP11_13.1@312.5,77.32 ; C23_13.2@312.2,63.6 312.2,64.29 v1(312.93,65.02) U22_13.2@312.93,67.77 U22_13.4@312.93,73.77 TP11_13.1@312.93,77.32
  Signal Layer 2 w0.35: v1(312.93,65.02) 326,51.95 v1(326,26.6)
  Signal Layer 2 w0.5: v1(312.93,65.02) v1@313,64.95
NetC23_14_1: C23_14.1 R113_14.2 | length 3
  Top Layer w0.5: C23_14.1@336.2,61.6 339.06,61.6 R113_14.2@339.18,61.72
NetC23_14_2: C23_14.2 R1_14.2 R2_14.2 R131_7.1 TP11_14.1 U22_14.2 U22_14.4 | length 46.8
  Top Layer w0.5: R1_14.2@335.79,84.334 335.917,84.207 335.917,80.584 336.5,80.001 TP11_14.1@336.5,77.32 ; C23_14.2@336.2,63.6 336.2,64.29 v1(336.93,65.02) U22_14.2@336.93,67.77 U22_14.4@336.93,73.77 TP11_14.1@336.93,77.32 ; R131_7.1@346,43.4 v1(346,45.4)
  Signal Layer 2 w0.5: v1@337,64.95 v1(336.93,65.02) 346,55.95 v1(346,45.4)
NetC23_15_1: C23_15.1 R113_15.2 | length 3
  Top Layer w0.5: C23_15.1@360.2,61.6 363.06,61.6 R113_15.2@363.18,61.72
NetC23_15_2: C23_15.2 R1_15.2 R2_15.2 TP11_15.1 U22_15.2 U22_15.4 U23_8.6 | length 67.7
  Top Layer w0.35: v1(374,26.6) 374,26.5 374.55,25.95 U23_8.6@376.14,25.95
  Top Layer w0.5: R1_15.2@359.79,84.334 359.917,84.207 359.917,80.584 360.5,80.001 TP11_15.1@360.5,77.32 ; C23_15.2@360.2,63.6 360.2,64.29 v1(360.93,65.02) U22_15.2@360.93,67.77 U22_15.4@360.93,73.77 TP11_15.1@360.93,77.32
  Signal Layer 2 w0.35: v1(360.93,65.02) 374,51.95 v1(374,26.6)
  Signal Layer 2 w0.5: v1(360.93,65.02) v1@361,64.95
NetC23_16_1: C23_16.1 R113_16.2 | length 3
  Top Layer w0.5: C23_16.1@384.2,61.6 387.06,61.6 R113_16.2@387.18,61.72
NetC23_16_2: C23_16.2 R1_16.2 R2_16.2 R131_8.1 TP11_16.1 U22_16.2 U22_16.4 | length 46.7
  Top Layer w0.5: R1_16.2@383.79,84.334 383.917,84.207 383.917,80.584 384.5,80.001 TP11_16.1@384.5,77.32 ; C23_16.2@384.2,63.6 384.2,64.29 v1(384.93,65.02) U22_16.2@384.93,67.77 U22_16.4@384.93,73.77 TP11_16.1@384.93,77.32 ; R131_8.1@394,43.4 v1(394,45.4)
  Signal Layer 2 w0.5: v1(384.93,65.02) 394,55.95 v1(394,45.4)
NetC25_2: C25.2 L2.2 U3.6 U3.8 | length 11.2
  Top Layer w0.5: U3.8@49.7,254.766 46.725,254.766 46.43,254.471 L2.2@45.475,254.471 45.475,256.196 45.675,256.396 45.675,257.146 45.835,257.306 U3.6@49.7,257.306
NetC46_1: C46.1 U4.92 | length 5.7
  Top Layer w0.254: U4.92@159.411,163.681 159.411,166.201 159.8,166.59 v1(159.8,166.8)
  Bottom Layer w0.254: C46.1@158.086,167.935 158.086,167.554 158.84,166.8 v1(159.8,166.8)
NetC47_1: C47.1 U4.148 | length 6
  Top Layer w0.254: U4.148@167.325,187.1 170,187.1 171.703,188.803 C47.1@172.65,188.803
NetC50_2: C50.2 R33.1 R36.2 U5.5 | length 10
  Top Layer w0.508: U5.5@208.7,201.97 v1@209.71,201.97 ; v1(213.661,201.963) 214.875,201.963 R36.2@214.882,201.97 ; C50.2@215.136,199.684 R36.2@215.136,201.716 ; R36.2@215.136,201.97 R33.1@215.136,204.002
  Bottom Layer w0.508: v1(209.964,201.97) 209.971,201.963 v1(213.661,201.963)
NetC53_2: C53.2 R40.1 R42.2 U6.5 | length 11
  Top Layer w0.508: U6.5@208.7,194.35 v1(209.964,194.35) ; v1(213.536,194.363) 215.036,194.363 R42.2@215.136,194.263 ; C53.2@215.136,192.318 R42.2@215.136,194.263 ; R40.1@215.136,196.382 215.136,194.35 R42.2@215.136,194.263
  Bottom Layer w0.508: v1(209.964,194.35) v1@213.849,194.35 ; v1(213.536,194.363) v1@213.662,194.363
NetC55_2: C55.2 R45.1 R46.2 U7.5 | length 10.5
  Top Layer w0.508: U7.5@208.7,186.476 v1(209.964,186.476) ; v1(213.774,186.476) R46.2@215.136,186.476 ; C55.2@215.136,184.444 R46.2@215.136,186.476 ; R45.1@215.136,188.508 R46.2@215.136,186.476
  Bottom Layer w0.508: v1(209.964,186.476) v1(213.774,186.476)
NetC57_2: C57.2 R49.1 R51.2 U8.5 | length 10.5
  Top Layer w0.508: U8.5@208.7,178.602 v1(209.964,178.602) ; v1(213.266,178.602) R51.2@215.136,178.602 ; C57.2@215.136,176.57 R51.2@215.136,178.602 ; R49.1@215.136,180.634 R51.2@215.136,178.602
  Bottom Layer w0.508: v1(209.964,178.602) v1(213.266,178.602)
NetC58_1: C58.1 C59.1 J28.1 L3.2 | length 15.6
  Top Layer w0.5: J28.1@154.575,272 154.575,270.225 157.3,267.5 C59.1@160.4,267.5 C58.1@160.4,264.4 160.4,260.895 L3.2@160.225,260.72
NetC60_1: C60.1 DD2.4 L3.1 | length 13.1
  Top Layer w0.2: DD2.4@154.335,250.772 155.595,250.772
  Top Layer w0.254: 155.595,250.772 157.185,252.362 v1(157.185,253.144) 157.185,255.901 160.005,258.72 L3.1@160.225,258.72
  Bottom Layer w0.254: v1(157.185,253.144) 157.185,252.456 C60.1@158.021,251.62
NetC61_1: C61.1 DD1.17 | length 3.4
  Top Layer w0.508: DD1.17@124.341,258.2 124.341,261.336 C61.1@124.506,261.501
NetC61_2: C61.2 DD1.18 | length 3.4
  Top Layer w0.508: C61.2@122.906,261.501 123.071,261.336 DD1.18@123.071,258.2
NetC62_2: C62.2 C65.2 DD2.2 DD2.3 DD2.9 | length 15.3
  Top Layer w0.2: v1@148.345,250.772 DD2.9@151.335,250.772 ; DD2.3@154.335,250.322 DD2.2@154.335,249.872 v1@156.981,249.872
  Top Layer w0.254: v1(148.325,250.792) v1@148.345,250.772 ; v1@156.981,249.872 v1(157.177,250.068)
  Bottom Layer w0.254: v1(148.325,250.792) C62.2@149.811,250.792 C65.2@155.907,250.792 156.199,250.792 v1@156.923,250.068
NetC63_1: C63.1 DD1.13 | length 3.4
  Top Layer w0.508: DD1.13@129.421,258.2 129.421,261.336 C63.1@129.586,261.501
NetC63_2: C63.2 DD1.14 | length 3.4
  Top Layer w0.508: C63.2@127.986,261.501 128.151,261.336 DD1.14@128.151,258.2
NetC64_1: C64.1 C68.2 DD1.20 | length 8.1
  Top Layer w0.508: C68.2@117.862,257.669 118.024,257.831 DD1.20@120.531,257.831 ; C64.1@120.366,263.533 120.531,263.368 DD1.20@120.531,258.2
NetC64_2: C64.2 DD1.19 | length 5.4
  Top Layer w0.508: DD1.19@121.801,258.2 121.801,263.368 C64.2@121.966,263.533
NetC67_2: C67.2 R53.1 U25.4 | length 7.2
  Top Layer w0.3: R53.1@154.3,263.3 154.3,261.509 153.923,261.132 U25.4@153.923,258.805 156.445,258.805 C67.2@156.45,258.8
NetC69_2: C69.2 R52.1 U25.6 | length 7.6
  Top Layer w0.254: C69.2@150.261,258.732 152.55,258.732 U25.6@152.623,258.805 152.623,259.927 150.867,261.683 R52.1@150.867,263.308
NetC70_2: C70.2 J16.11 | length 7
  Top Layer w0.508: J16.11@139.784,272.276 J16.11@141.105,270.955
  Bottom Layer w0.508: C70.2@136.063,275.73 136.33,275.73 J16.11@139.784,272.276
NetC71_2: C71.2 DD1.12 | length 5.4
  Top Layer w0.508: C71.2@130.526,263.533 130.691,263.368 DD1.12@130.691,258.2
NetC72_2: C72.2 J28.6 R56.2 | length 25.5
  Top Layer w0.6: J28.6@148.55,272.1 J28.6@148.55,277.6 J28.6@157.45,277.6 J28.6@157.45,272.1 ; J28.6@157.654,271.973 C72.2@160.504,271.973 ; J28.6@157.654,277.473 R56.2@160.404,277.473
NetC73_2: C73.2 C78.1 C79.2 C80.2 C81.2 C82.2 L4.2 R60.2 R61.2 R62.2 R63.2 T1.1 T1.4 T1.7 T1.10 U9.5 U10.1 U10.19 | length 82.4
  Top Layer w0.254: C78.1@184.511,235.668 184.665,235.514 C79.2@188.321,235.514 ; C82.2@186.721,235.514 190.3,235.514 191.929,235.514 U10.1@193.969,233.474 ; U10.19@197.119,234.124 197.119,234.791 201.478,239.15 C73.2@201.478,243.511
  Top Layer w0.508: C81.2@184,241.375 184.007,241.368 R63.2@186.433,241.368 ; v1(186.721,238.6) 186.433,238.888 R63.2@186.433,241.368 ; 190.3,235.514 190.2,235.614 190.2,237.2 R60.2@190.2,239.3 190.2,240.5 191,241.3 192.6,241.3 193.4,242.1 193.4,242.9 193.4,243.8 194.218,244.618 194.218,248.413 ; T1.4@190.408,246.414 190.408,248.159 ; U9.5@197.96,241.273 198.028,241.341 198.028,248.159 ; 198.053,243.511 C73.2@201.478,243.511 ; C80.2@205.6,248.5 198.369,248.5 198.028,248.159 ; R63.2@186.433,241.368 186.598,241.533 186.598,248.375 186.636,248.413 194.218,248.413 ; 194.218,248.413 197.774,248.413 198.028,248.159
NetC74_2: C74.2 U10.4 X2.2 | length 11.4
  Top Layer w0.254: C74.2@182.949,230.98 183.071,231.102 X2.2@185.959,231.102 188.202,231.102 189.074,231.974 U10.4@193.969,231.974
NetC75_2: C75.2 C77.2 U10.6 | length 6.9
  Top Layer w0.254: C77.2@189.903,227.18 C75.2@191.681,227.18 192.443,227.942 192.443,230.098 193.319,230.974 U10.6@193.969,230.974
NetC83_2: C83.2 U10.5 X2.1 | length 12.8
  Top Layer w0.254: C83.2@182.949,227.17 183.081,227.302 X2.1@185.959,227.302 187.079,227.302 191.251,231.474 U10.5@193.969,231.474
NetC84_2: C84.2 R77.2 R79.2 U11.6 | length 6.7
  Top Layer w0.508: U11.6@275.464,194.454 275.464,197.34 C84.2@275.468,197.344 R77.2@275.468,199.122 R79.2@275.468,201.12
NetC93_1: C93.1 U11.5 | length 3.1
  Top Layer w0.508: U11.5@276.734,194.454 276.734,195.972 277.496,196.734 C93.1@277.496,197.204
NetC94_1: C94.1 L24.1 TP4.1 U12.12 | length 14.7
  Top Layer w0.75: TP4.1@294.2,236.1 TP4.1@294.5,236.1 296.5,236.1 297.2,236.8 L24.1@299.9,236.8 301.1,236.8 301.5,237.2 C94.1@304.4,237.2 ; C94.1@304.43,237.2 U12.12@304.43,241.2
NetC97_2: C97.2 R80.1 R81.2 U12.28 | length 9.5
  Top Layer w0.5: R81.2@287.1,249.6 R80.1@287.1,247.4 290.11,250.41 U12.28@290.46,250.41 290.46,253.06 C97.2@290.5,253.1
NetC98_2: C98.2 L7.1 TP2.1 U13.2 | length 15
  Top Layer w0.508: L7.1@230.227,225.1 230.227,232.068 231.202,233.043 236.11,233.043 236.323,232.83 U13.2@236.323,231.354
NetC100_2: C100.2 U13.4 | length 3.9
  Top Layer w0.508: C100.2@237.593,227.948 237.593,228.512 238.863,229.782 U13.4@238.863,231.354
NetC105_2: C105.2 L9.1 TP3.1 U14.2 | length 16.5
  Top Layer w0.508: L9.1@258.587,210.1 258.587,212.304 257.587,213.304 TP3.1@257.587,213.558 257.587,216.387 259.114,217.914 C105.2@260.635,217.914 260.635,218.638 260.889,218.892 263.429,218.892 263.937,218.384 U14.2@263.937,216.654
NetC106_2: C106.2 U14.4 | length 3.9
  Top Layer w0.508: C106.2@265.207,213.248 265.207,214.066 266.477,215.336 U14.4@266.477,216.654
NetC107_2: C107.2 R95.2 R97.2 U15.6 | length 7.2
  Top Layer w0.508: R97.2@295.818,201.306 R95.2@295.818,199.274 C107.2@295.818,197.242 296.542,196.518 U15.6@296.542,194.454
NetC117_1: C117.1 U15.5 | length 3.3
  Top Layer w0.508: U15.5@297.812,194.454 297.812,197.574 C117.1@297.95,197.712
NetC118_2: C118.2 L10.1 TP5.1 U16.2 | length 16.8
  Top Layer w0.508: L10.1@238.693,203.794 238.709,203.81 238.709,207.604 238.709,212.43 239.001,212.722 C118.2@241.503,212.722 244.767,212.722 245.059,212.43 U16.2@245.059,210.85
NetC119_2: C119.2 U16.4 | length 3.8
  Top Layer w0.508: C119.2@246.329,207.548 246.329,207.858 247.599,209.128 U16.4@247.599,210.85
NetC120_1: C120.1 C124.2 L13.1 R102.2 TP7.1 U17.1 | length 17.3
  Top Layer w0.254: R102.2@282.943,223.498 U17.1@282.943,225.76
  Top Layer w0.508: L13.1@278.1,211 278.2,211.1 TP7.1@278.2,214.9 279.7,214.9 282.681,217.881 C124.2@282.681,221.204 R102.2@282.681,223.236
NetC120_2: C120.2 R100.2 | length 2.6
  Top Layer w0.508: C120.2@284.281,218.918 R100.2@286.844,218.918
NetC121_2: C121.2 L12.1 R103.6 R103.7 TP6.1 TP8.1 U18.7 | length 26.2
  Top Layer w0.381: L12.1@226.7,184.8 226.807,184.907 TP6.1@230.499,184.907 ; TP8.1@230.229,189.987 230.229,185.177 TP6.1@230.499,184.907 ; R103.7@235.721,187.365 R103.6@235.071,187.365 235.071,184.691 ; U18.7@241.6,188.9 U18.7@241.575,188.9 240.4,188.9 239.2,187.7 238.1,187.7 237.2,186.8 237.2,185.3 236.591,184.691 235.071,184.691 ; TP6.1@230.499,184.907 230.715,184.691 235.071,184.691
NetC123_2: C123.2 L11.2 U18.1 U18.2 | length 6.2
  Top Layer w0.508: C123.2@245.975,185.6 U18.1@245.975,188.25 ; U18.2@245.975,188.871 U18.1@245.975,188.25 ; L11.2@248.928,188.25 U18.1@245.975,188.25
NetC125_2: C125.2 U18.6 | length 3.8
  Top Layer w0.381: C125.2@238.6,190.5 238.6,189.7 238.75,189.55 U18.6@241.575,189.55
NetC126_2: C126.2 L22.1 R103.1 R103.2 R103.3 TP8.2 | length 17.8
  Top Layer w0.381: L22.1@226.926,200.092 227.236,200.092 227.341,199.987 TP8.2@230.229,199.987 230.229,194.685 231.061,193.853 C126.2@235.595,193.853 235.721,193.727 R103.2@235.721,191.765 ; R103.3@235.091,191.765 R103.2@235.721,191.765 ; R103.1@236.371,191.765 R103.2@235.721,191.765
NetC128_1: C128.1 R106.2 | length 2.3
  Top Layer w0.508: C128.1@303.292,218.012 303.33,218.05 R106.2@303.33,220.26
NetC128_2: C128.2 C129.2 L14.1 R105.2 TP9.1 U19.5 | length 19.3
  Top Layer w0.508: TP9.1@304.754,214.578 TP9.1@304.892,214.716 ; C128.2@304.892,218.012 306.012,218.012 306.5,218.5 C129.2@306.5,220.8 306.5,223.6 306.246,223.854 R105.2@304.892,223.854 304.892,226.178 305.4,226.686 U19.5@305.4,227.822
  Top Layer w1: L14.1@304.754,211.575 TP9.1@304.754,214.578 ; TP9.1@304.892,214.716 TP9.1@304.892,214.9 C128.2@304.892,218.012
NetC130_2: C130.2 L15.1 TP10.1 U20.2 | length 20.1
  Top Layer w0.508: U20.2@257.466,185.816 257.466,191.566 258.3,192.4 260.1,192.4 261,191.5 C130.2@261,187.7 261.068,187.632 TP10.1@263.308,187.632 263.4,187.724 L15.1@263.4,191.6
NetC132_2: C132.2 U20.4 | length 3.6
  Top Layer w0.508: U20.4@254.926,185.816 254.926,187.4 C132.2@256.334,188.808
NetC146_2: C146.2 J30.6 R112.2 | length 25.1
  Top Layer w0.381: J30.6@91.823,272.282 J30.6@92.219,272.678
  Top Layer w0.9: J30.6@101.119,278.178 101.141,278.2 C146.2@103.659,278.2
  Top Layer w1: 89.689,272.282 J30.6@91.823,272.282 ; J30.6@92.219,272.678 J30.6@92.219,278.178 J30.6@101.119,278.178 J30.6@101.119,272.678
NetC148_1_2: C148_1.2 R3_1.2 U22_1.1 | length 6.9
  Top Layer w0.5: R3_1.2@20.8,62.4 C148_1.2@20.8,65.4 20.8,67.2 21.37,67.77 U22_1.1@22.63,67.77
NetC148_2_1: C148_2.1 J27_1.2 R1_2.1 R2_2.1 R3_2.1 R117_2.2 R132_1.1 TP11_2.2 | length 108
  Top Layer w0.5: v1(43.2,60.1) 42.8,60.5 R3_2.1@42.8,62.4 C148_2.1@42.8,65.4 42.8,73.02 TP11_2.2@38.5,77.32 41.764,80.584 45.123,80.584 45.25,80.711 R1_2.1@45.25,84.334
  Signal Layer 1 w0.5: v1(27,51.7) 38.3,51.7 43.2,56.6 v1(43.2,60.1)
  Signal Layer 2 w0.5: v1(27,26.4) v1(27,51.7)
  Bottom Layer w0.5: J27_1.2@14.6,14.724 J27_1.2@14.648,14.676 14.648,26.648 16.5,28.5 24.9,28.5 v1(27,26.4) 28.5,26.4 R132_1.1@28.6,26.5 ; TP11_2.2@38.5,77.32 38.65,77.17 R117_2.2@40.82,77.17
NetC148_2_2: C148_2.2 R3_2.2 U22_2.1 | length 6.9
  Top Layer w0.5: R3_2.2@44.8,62.4 C148_2.2@44.8,65.4 44.8,67.2 45.37,67.77 U22_2.1@46.63,67.77
NetC148_3_2: C148_3.2 R3_3.2 U22_3.1 | length 6.9
  Top Layer w0.5: R3_3.2@68.8,62.4 C148_3.2@68.8,65.4 68.8,67.2 69.37,67.77 U22_3.1@70.63,67.77
NetC148_4_1: C148_4.1 J27_2.2 R1_4.1 R2_4.1 R3_4.1 R117_4.2 R132_2.1 TP11_4.2 | length 108
  Top Layer w0.5: v1(91.2,60.1) 90.8,60.5 R3_4.1@90.8,62.4 C148_4.1@90.8,65.4 90.8,73.02 TP11_4.2@86.5,77.32 89.764,80.584 93.123,80.584 93.25,80.711 R1_4.1@93.25,84.334
  Signal Layer 1 w0.5: v1(75,51.7) 86.3,51.7 91.2,56.6 v1(91.2,60.1)
  Signal Layer 2 w0.5: v1(75,26.4) v1(75,51.7)
  Bottom Layer w0.5: J27_2.2@62.6,14.724 J27_2.2@62.648,14.676 62.648,26.648 64.5,28.5 72.9,28.5 v1(75,26.4) 76.5,26.4 R132_2.1@76.6,26.5 ; TP11_4.2@86.5,77.32 86.65,77.17 R117_4.2@88.82,77.17
NetC148_4_2: C148_4.2 R3_4.2 U22_4.1 | length 6.9
  Top Layer w0.5: R3_4.2@92.8,62.4 C148_4.2@92.8,65.4 92.8,67.2 93.37,67.77 U22_4.1@94.63,67.77
NetC148_5_2: C148_5.2 R3_5.2 U22_5.1 | length 6.9
  Top Layer w0.5: R3_5.2@116.8,62.4 C148_5.2@116.8,65.4 116.8,67.2 117.37,67.77 U22_5.1@118.63,67.77
NetC148_6_1: C148_6.1 J27_3.2 R1_6.1 R2_6.1 R3_6.1 R117_6.2 R132_3.1 TP11_6.2 | length 108
  Top Layer w0.5: v1(139.2,60.1) 138.8,60.5 R3_6.1@138.8,62.4 C148_6.1@138.8,65.4 138.8,73.02 TP11_6.2@134.5,77.32 137.764,80.584 141.123,80.584 141.25,80.711 R1_6.1@141.25,84.334
  Signal Layer 1 w0.5: v1(123,51.7) 134.3,51.7 139.2,56.6 v1(139.2,60.1)
  Signal Layer 2 w0.5: v1(123,26.4) v1(123,51.7)
  Bottom Layer w0.5: J27_3.2@110.6,14.724 J27_3.2@110.648,14.676 110.648,26.648 112.5,28.5 120.9,28.5 v1(123,26.4) 124.5,26.4 R132_3.1@124.6,26.5 ; TP11_6.2@134.5,77.32 134.65,77.17 R117_6.2@136.82,77.17
NetC148_6_2: C148_6.2 R3_6.2 U22_6.1 | length 6.9
  Top Layer w0.5: R3_6.2@140.8,62.4 C148_6.2@140.8,65.4 140.8,67.2 141.37,67.77 U22_6.1@142.63,67.77
NetC148_7_2: C148_7.2 R3_7.2 U22_7.1 | length 6.9
  Top Layer w0.5: R3_7.2@164.8,62.4 C148_7.2@164.8,65.4 164.8,67.2 165.37,67.77 U22_7.1@166.63,67.77
NetC148_8_1: C148_8.1 J27_4.2 R1_8.1 R2_8.1 R3_8.1 R117_8.2 R132_4.1 TP11_8.2 | length 108
  Top Layer w0.5: v1(187.2,60.1) 186.8,60.5 R3_8.1@186.8,62.4 C148_8.1@186.8,65.4 186.8,73.02 TP11_8.2@182.5,77.32 185.764,80.584 189.123,80.584 189.25,80.711 R1_8.1@189.25,84.334
  Signal Layer 1 w0.5: v1(171,51.7) 182.3,51.7 187.2,56.6 v1(187.2,60.1)
  Signal Layer 2 w0.5: v1(171,26.4) v1(171,51.7)
  Bottom Layer w0.5: J27_4.2@158.6,14.724 J27_4.2@158.648,14.676 158.648,26.648 160.5,28.5 168.9,28.5 v1(171,26.4) 172.5,26.4 R132_4.1@172.6,26.5 ; TP11_8.2@182.5,77.32 182.65,77.17 R117_8.2@184.82,77.17
NetC148_8_2: C148_8.2 R3_8.2 U22_8.1 | length 6.9
  Top Layer w0.5: R3_8.2@188.8,62.4 C148_8.2@188.8,65.4 188.8,67.2 189.37,67.77 U22_8.1@190.63,67.77
NetC148_9_2: C148_9.2 R3_9.2 U22_9.1 | length 6.9
  Top Layer w0.5: R3_9.2@212.8,62.4 C148_9.2@212.8,65.4 212.8,67.2 213.37,67.77 U22_9.1@214.63,67.77
NetC148_10_1: C148_10.1 J27_5.2 R1_10.1 R2_10.1 R3_10.1 R117_10.2 R132_5.1 TP11_10.2 | length 108
  Top Layer w0.5: v1(235.2,60.1) 234.8,60.5 R3_10.1@234.8,62.4 C148_10.1@234.8,65.4 234.8,73.02 TP11_10.2@230.5,77.32 233.764,80.584 237.123,80.584 237.25,80.711 R1_10.1@237.25,84.334
  Signal Layer 1 w0.5: v1(219,51.7) 230.3,51.7 235.2,56.6 v1(235.2,60.1)
  Signal Layer 2 w0.5: v1(219,26.4) v1(219,51.7)
  Bottom Layer w0.5: J27_5.2@206.6,14.724 J27_5.2@206.648,14.676 206.648,26.648 208.5,28.5 216.9,28.5 v1(219,26.4) 220.5,26.4 R132_5.1@220.6,26.5 ; TP11_10.2@230.5,77.32 230.65,77.17 R117_10.2@232.82,77.17
NetC148_10_2: C148_10.2 R3_10.2 U22_10.1 | length 6.9
  Top Layer w0.5: R3_10.2@236.8,62.4 C148_10.2@236.8,65.4 236.8,67.2 237.37,67.77 U22_10.1@238.63,67.77